# EAGLE board ProgrammableOLED (EAGLE 7.3.0)
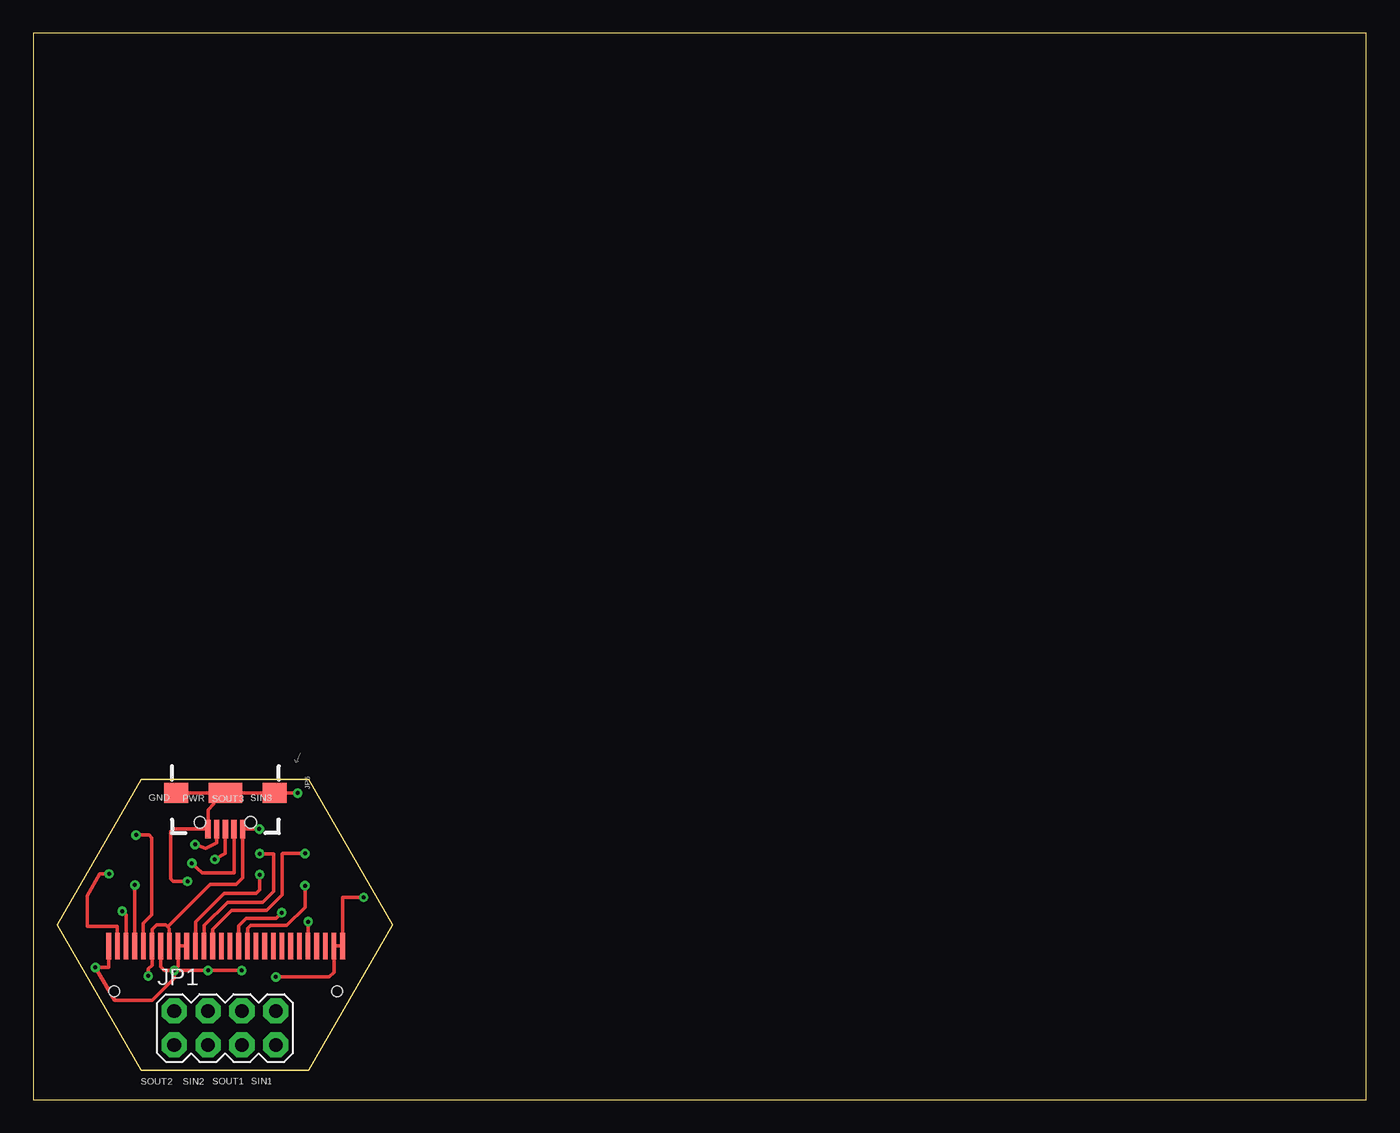
[diagram p0: board, top side]
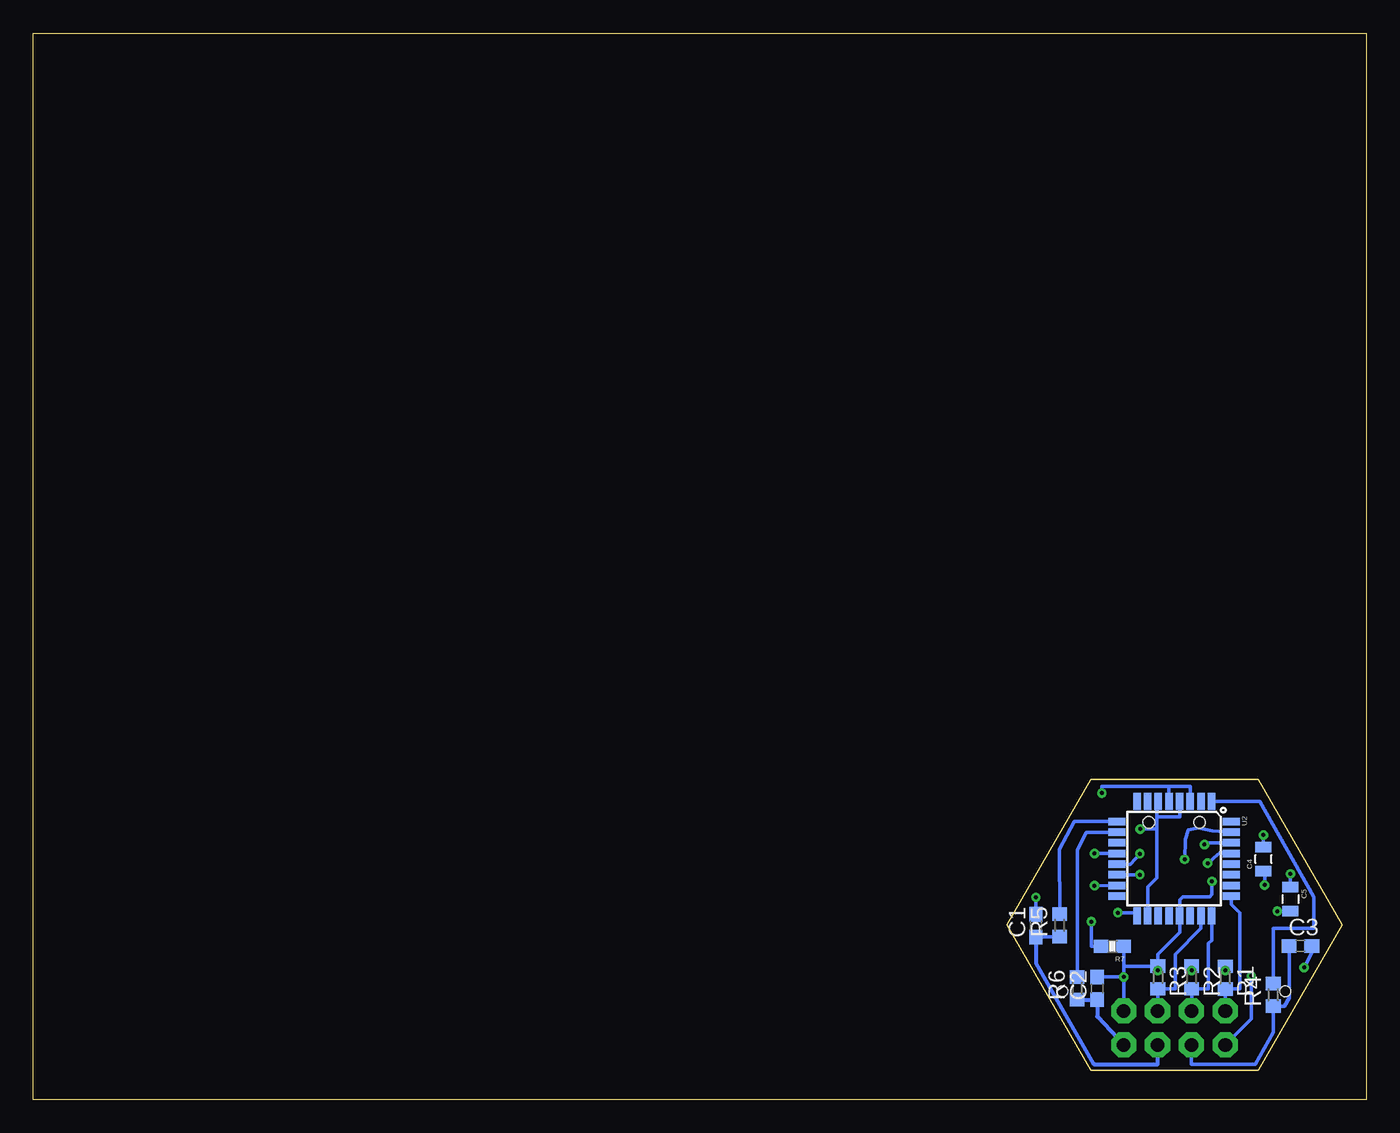
[diagram p1: board, bottom side, seen from below]

Size 100 x 80 mm. Coordinates in mm from the lower left corner, seen from the top.
Outline: 0,0 100,0 100,80 0,80 0,0
Outline: 8.08,24.01 20.67,24.01 26.97,13.1 20.67,2.2 8.08,2.2 1.78,13.1 8.08,24.01
Copper layers (1*16): Top 0.035mm / dielectric 1.5mm / Bottom 0.035mm
Design rules "default *": minimum track width 10mil, minimum drill 24mil, track to track 8mil, track to pad 8mil, pad to pad 8mil, via to via 8mil, smd to smd 8mil, copper to edge 0mil, drill to drill 8mil, minimum pad ring 10mil, minimum via ring 8mil, stop-mask expansion 4mil, vias tented up to drill 0mil, thermal gap 10mil

## Footprints (pad centres in the part's own frame; a part is rotated, then mirrored left to right if it is on the bottom)
C0603 = smd 1.1 x 1: 1 -0.85,0; 2 0.85,0
0805 = smd 0.8 x 1.2: 1 -0.9,0; 2 0.9,0
2X4 = drill 1.016 pad 1.88 octagon: 1 -3.81,-1.27; 2 -3.81,1.27; 3 -1.27,-1.27; 4 -1.27,1.27; 5 1.27,-1.27; 6 1.27,1.27; 7 3.81,-1.27; 8 3.81,1.27
USB-AB-MICRO-SMD_V03 = smd 1.4 x 0.4: D+1 2.7,0; D-1 2.7,0.65; GND1 2.7,-1.3; ID1 2.7,-0.65; VBUS1 2.7,1.3 | smd 1.5 x 1.8: SHIELD1 0,3.68; SHIELD3 0,-3.68 | smd 1.5 x 2.5: SHIELD2 0,0 | hole 0.85: 2.2,1.9; 2.2,-1.9
OLED-0.66-64X48 = smd 0.35 x 2: 1 0,0; 2 0.65,0; 3 1.3,0; 4 1.95,0; 5 2.6,0; 6 3.25,0; 7 3.9,0; 8 4.55,0; 9 5.2,0; 10 5.85,0; 11 6.5,0; 12 7.15,0; 13 7.8,0; 14 8.45,0; 15 9.1,0; 16 9.75,0; 17 10.4,0; 18 11.05,0; 19 11.7,0; 20 12.35,0; 21 13,0; 22 13.65,0; 23 14.3,0; 24 14.95,0; 25 15.6,0; 26 16.25,0; 27 16.9,0; 28 17.55,0 | hole 0.8: 17.15,-3.4; 0.4,-3.4
R0603 = smd 1 x 1.1: 1 -0.85,0; 2 0.85,0
0603-RES = smd 1.1 x 1: 1 -0.85,0; 2 0.85,0
TQFP32-08 = smd 1.27 x 0.559: 1 -4.293,2.8; 2 -4.293,2; 3 -4.293,1.2; 4 -4.293,0.4; 5 -4.293,-0.4; 6 -4.293,-1.2; 7 -4.293,-2; 8 -4.293,-2.8; 17 4.293,-2.8; 18 4.293,-2; 19 4.293,-1.2; 20 4.293,-0.4; 21 4.293,0.4; 22 4.293,1.2; 23 4.293,2; 24 4.293,2.8 | smd 0.559 x 1.27: 9 -2.8,-4.293; 10 -2,-4.293; 11 -1.2,-4.293; 12 -0.4,-4.293; 13 0.4,-4.293; 14 1.2,-4.293; 15 2,-4.293; 16 2.8,-4.293; 25 2.8,4.293; 26 2,4.293; 27 1.2,4.293; 28 0.4,4.293; 29 -0.4,4.293; 30 -1.2,4.293; 31 -2,4.293; 32 -2.8,4.293

## Placement (x,y rotation side)
C1  0.22uF  [C0603]  24.78,13.05 90 bottom
C2  0.22uF  [C0603]  20.18,8.34 90 bottom
C3  0.22uF  [C0603]  4.93,11.52 0 bottom
C4  1uF X5R  [0805]  7.71,18.05 90 bottom
C5  1uF X5R  [0805]  5.68,15.03 270 bottom
JP1  [2X4]  14.38,5.37 0 top
JP5  [USB-AB-MICRO-SMD_V03]  14.41,23 270 top
OLED1  OLED0.66  [OLED-0.66-64X48]  5.66,11.52 0 top
R1  1M  [R0603]  10.57,9.15 270 bottom
R2  1M  [R0603]  13.09,9.16 270 bottom
R3  1M  [R0603]  15.63,9.16 270 bottom
R4  4.7K  [R0603]  6.97,7.86 90 bottom
R5  4.7K  [R0603]  23,13.07 90 bottom
R6  4.7K  [R0603]  21.68,8.34 90 bottom
R7  390k  [0603-RES]  19.04,11.49 180 bottom
U2  ATMEGA328P_TQFP  [TQFP32-08]  14.4,18.06 270 bottom

## Library data of the parts
C1-C3 R1-R6 = adafruit
C4 C5 R7 = SparkFun-Passives
JP1 = SparkFun-Connectors
JP5 = SparkFun-Connectors; PROD_ID: CONN-11794
OLED1 = microView-temp
U2 = SparkFun-DigitalIC; PROD_ID: IC-09069

## Nets
C1N: C4.2 OLED1.5
C1P: C4.1 OLED1.4
C2N: C5.2 OLED1.3
C2P: C5.1 OLED1.2
GND: C1.2 C2.2 C3.2 JP1.8 JP5.GND1 JP5.SHIELD1 JP5.SHIELD2 JP5.SHIELD3 OLED1.1 OLED1.7 OLED1.9 OLED1.10 OLED1.27 OLED1.28 R1.1 R2.1 R3.1 R7.1 U2.3 U2.5 U2.21
IREF: OLED1.24 R7.2
OLED-CS: OLED1.11 U2.14
OLED-D/C: OLED1.13 U2.12
OLED-MOSI: OLED1.17 U2.15
OLED-RST: OLED1.12 U2.13
OLED-SCK: OLED1.16 U2.17
OUT1: R4.2 U2.1
OUT2: R5.2 U2.9
OUT3: R6.2 U2.10
RESET: JP5.D-1 U2.29
RX: JP5.ID1 U2.30
SIN1: JP1.6 R3.2 U2.23
SIN2: JP1.4 R2.2 U2.24
SIN3: JP1.2 R1.2 U2.25
SOUT1: C3.1 JP1.3 R4.1
SOUT2: C1.1 JP1.5 R5.1
SOUT3: C2.1 JP1.7 R6.1
TX: JP5.D+1 U2.31
VCC: JP1.1 JP5.VBUS1 OLED1.6 OLED1.8 U2.4 U2.6 U2.18

## Tracks (layer width: path | path; a pad name or v marks a point on that pad's centre or on a via)
C1N  (via drill 0.3 pad 0.25)
  Top 0.254: v7.71,19.84 8.7,19.84 8.89,19.65 8.89,13.86 8.25,13.22 OLED1.5
  Bottom 0.254: C4.2 v7.71,19.84
C1P  (via drill 0.3 pad 0.25)
  Top 0.254: OLED1.4 v7.61,16.1
  Bottom 0.254: v7.61,16.1 7.61,17.05 C4.1
C2N  (via drill 0.3 pad 0.25)
  Top 0.254: OLED1.3 6.96,13.84 v6.67,14.13
  Bottom 0.254: v6.67,14.13 C5.2
C2P  (via drill 0.3 pad 0.25)
  Top 0.254: OLED1.2 6.31,12.98 4.03,12.98 4.03,15.27 4.98,16.93 v5.69,16.93
  Bottom 0.254: v5.69,16.93 C5.1
GND  (via drill 0.3 pad 0.25)
  Top 0.254: OLED1.10 OLED1.9 10.86,9.98 v10.57,9.69 | JP5.SHIELD3 13.54,23 | 13.54,23 JP5.SHIELD2 JP5.SHIELD1 v19.83,22.99 | 13.54,23 13.54,22.17 13.11,21.74 JP5.GND1 10.5,20.3 10.32,20.12 10.32,16.55 10.49,16.38 v11.56,16.38 v11.57,16.37 | v18.19,9.19 22.19,9.19 22.56,9.56 OLED1.27 OLED1.28 23.21,15.16 23.22,15.17 v24.78,15.17 | OLED1.1 5.66,9.91 v4.66,9.91 6.12,7.44 8.91,7.43 10.57,9.09 v10.57,9.69 | v15.63,9.69 v13.1,9.69 v10.57,9.69 | OLED1.7 9.56,9.96 9.83,9.69 v10.57,9.69
  Bottom 0.254: R7.1 18.19,10.41 | R3.1 18.2,10 18.19,10.41 | R3.1 15.63,10.91 14,12.54 U2.21 14,14.97 13.75,15.22 11.75,15.22 11.57,15.4 v11.57,16.37 | 18.19,10.41 18.19,9.23 | 18.19,9.23 JP1.8 | 18.22,9.2 18.19,9.23 | 18.22,9.2 v18.19,9.19 | 18.22,9.2 C2.2 | C1.2 v24.78,15.17 | C3.2 4.08,11.02 v4.66,9.91 | R3.1 v15.63,9.69 | v13.1,9.69 R2.1 | R1.1 v10.57,9.69 | U2.3 13.2,23.51 14.79,23.51 | 14.79,23.51 19.83,23.51 v19.83,22.99 | U2.5 14.8,23.5 14.79,23.51
IREF  (via drill 0.3 pad 0.25)
  Top 0.254: OLED1.24 v20.62,13.34
  Bottom 0.254: v20.62,13.34 20.61,11.49 R7.2
OLED-CS  (via drill 0.3 pad 0.25)
  Top 0.254: v16.98,16.86 16.98,15.74 16.72,15.48 14.32,15.48 12.17,13.33 OLED1.11
  Bottom 0.254: U2.14 v16.98,16.86
OLED-D/C  (via drill 0.3 pad 0.25)
  Top 0.254: OLED1.13 13.46,12.77 14.87,14.18 17.52,14.18 18.68,15.34 18.68,18.45 U2.12 v20.39,18.46
  Bottom 0.254: U2.12 v20.39,18.46
OLED-MOSI  (via drill 0.3 pad 0.25)
  Top 0.254: v20.39,16.05 20.39,14.43 19.02,13.06 16.29,13.06 16.07,12.84 OLED1.17
  Bottom 0.254: U2.15 v20.39,16.05
OLED-RST  (via drill 0.3 pad 0.25)
  Top 0.254: OLED1.12 12.82,13.06 14.57,14.81 17.22,14.81 18.04,15.63 18.04,18.44 v16.98,18.44
  Bottom 0.254: v16.98,18.44 17.7,17.65 U2.13
OLED-SCK  (via drill 0.3 pad 0.25)
  Top 0.254: OLED1.16 15.41,13.05 15.96,13.6 18.21,13.6 v18.63,14.02
  Bottom 0.254: v18.63,14.02 17.45,14.02 U2.17
OUT1
  Bottom 0.254: R4.2 6.97,12.86 3.93,12.86 3.93,15.21 7.97,22.36 U2.1
OUT2
  Bottom 0.254: U2.9 21.88,20.86 23.01,18.78 R5.2
OUT3
  Bottom 0.254: R6.2 21.68,18.75 20.99,20.06 U2.10
RESET  (via drill 0.3 pad 0.25)
  Top 0.254: v11.89,17.73 12.67,16.99 13.6,16.99 15.07,17 JP5.D-1
  Bottom 0.254: U2.29 10.16,18.51 10.98,18.49 11.43,18.13 v11.89,17.73
RX  (via drill 0.3 pad 0.25)
  Top 0.254: v12.14,19.14 12.92,18.83 13.77,19.26 JP5.ID1
  Bottom 0.254: U2.30 11.09,19.24 11.77,19.27 11.81,19.27 v12.14,19.14
SIN1
  Bottom 0.254: U2.23 12.4,12.83 14.32,10.91 14.32,8.31 R3.2 15.63,6.66 JP1.6
SIN2
  Bottom 0.254: U2.24 11.6,11.96 11.83,11.73 11.83,8.31 R2.2 13.09,6.66 JP1.4
SIN3
  Bottom 0.254: JP1.2 R1.2 9.47,8.3 9.47,14.01 10.11,14.65 U2.25
SOUT1
  Bottom 0.254: JP1.3 13.11,2.65 8.32,2.65 6.98,5.03 R4.1 6.13,7.01 5.78,7.64 C3.1
SOUT2
  Bottom 0.254: R5.1 C1.1
  Bottom 0.305: C1.1 24.78,10.24 20.42,2.66 15.64,2.66 JP1.5
SOUT3
  Bottom 0.305: R6.1 C2.1 20.17,6.23 JP1.7
TX  (via drill 0.3 pad 0.25)
  Top 0.254: v13.62,18.02 14.38,18.48 JP5.D+1
  Bottom 0.254: U2.31 10.14,20.03 11.54,20.16 12.59,20.39 13.33,20.23 13.58,19.52 v13.62,18.02
VCC  (via drill 0.3 pad 0.25)
  Top 0.254: v8.62,9.27 8.62,9.8 8.9,10.08 OLED1.6 8.91,12.76 9.24,13.09 9.93,13.09 10.06,12.96 | 10.06,12.96 10.21,12.81 OLED1.8 | 10.06,12.96 13.25,16.14 15.21,16.14 15.71,16.64 JP5.VBUS1 v16.95,20.3
  Bottom 0.254: 16.42,13.79 U2.18 16.4,15.95 15.71,16.64 JP5.VBUS1 | 15.69,22.26 U2.6 15.71,22.24 15.71,21.18 | JP1.1 8.61,6.06 v8.61,9.26 v8.62,9.27 | JP5.VBUS1 v16.95,20.3 | JP5.VBUS1 15.71,21.18 | U2.4 14,21.22 14.01,21.21 15.68,21.21 15.71,21.18

## Text on the board
tPlace: GND | PWR | SOUT3 | SIN3 | SOUT2 | SIN2 | SOUT1 | SIN1